# Altium PCB pcb.PcbDoc
Units mm, origin at the board's own origin, x right, y up, seen from the top; angles counter-clockwise.
Board outline 70 x 60 mm, 2 copper layers (Top Layer, Bottom Layer); 55 components, 56 nets, 216 pads, 87 vias.
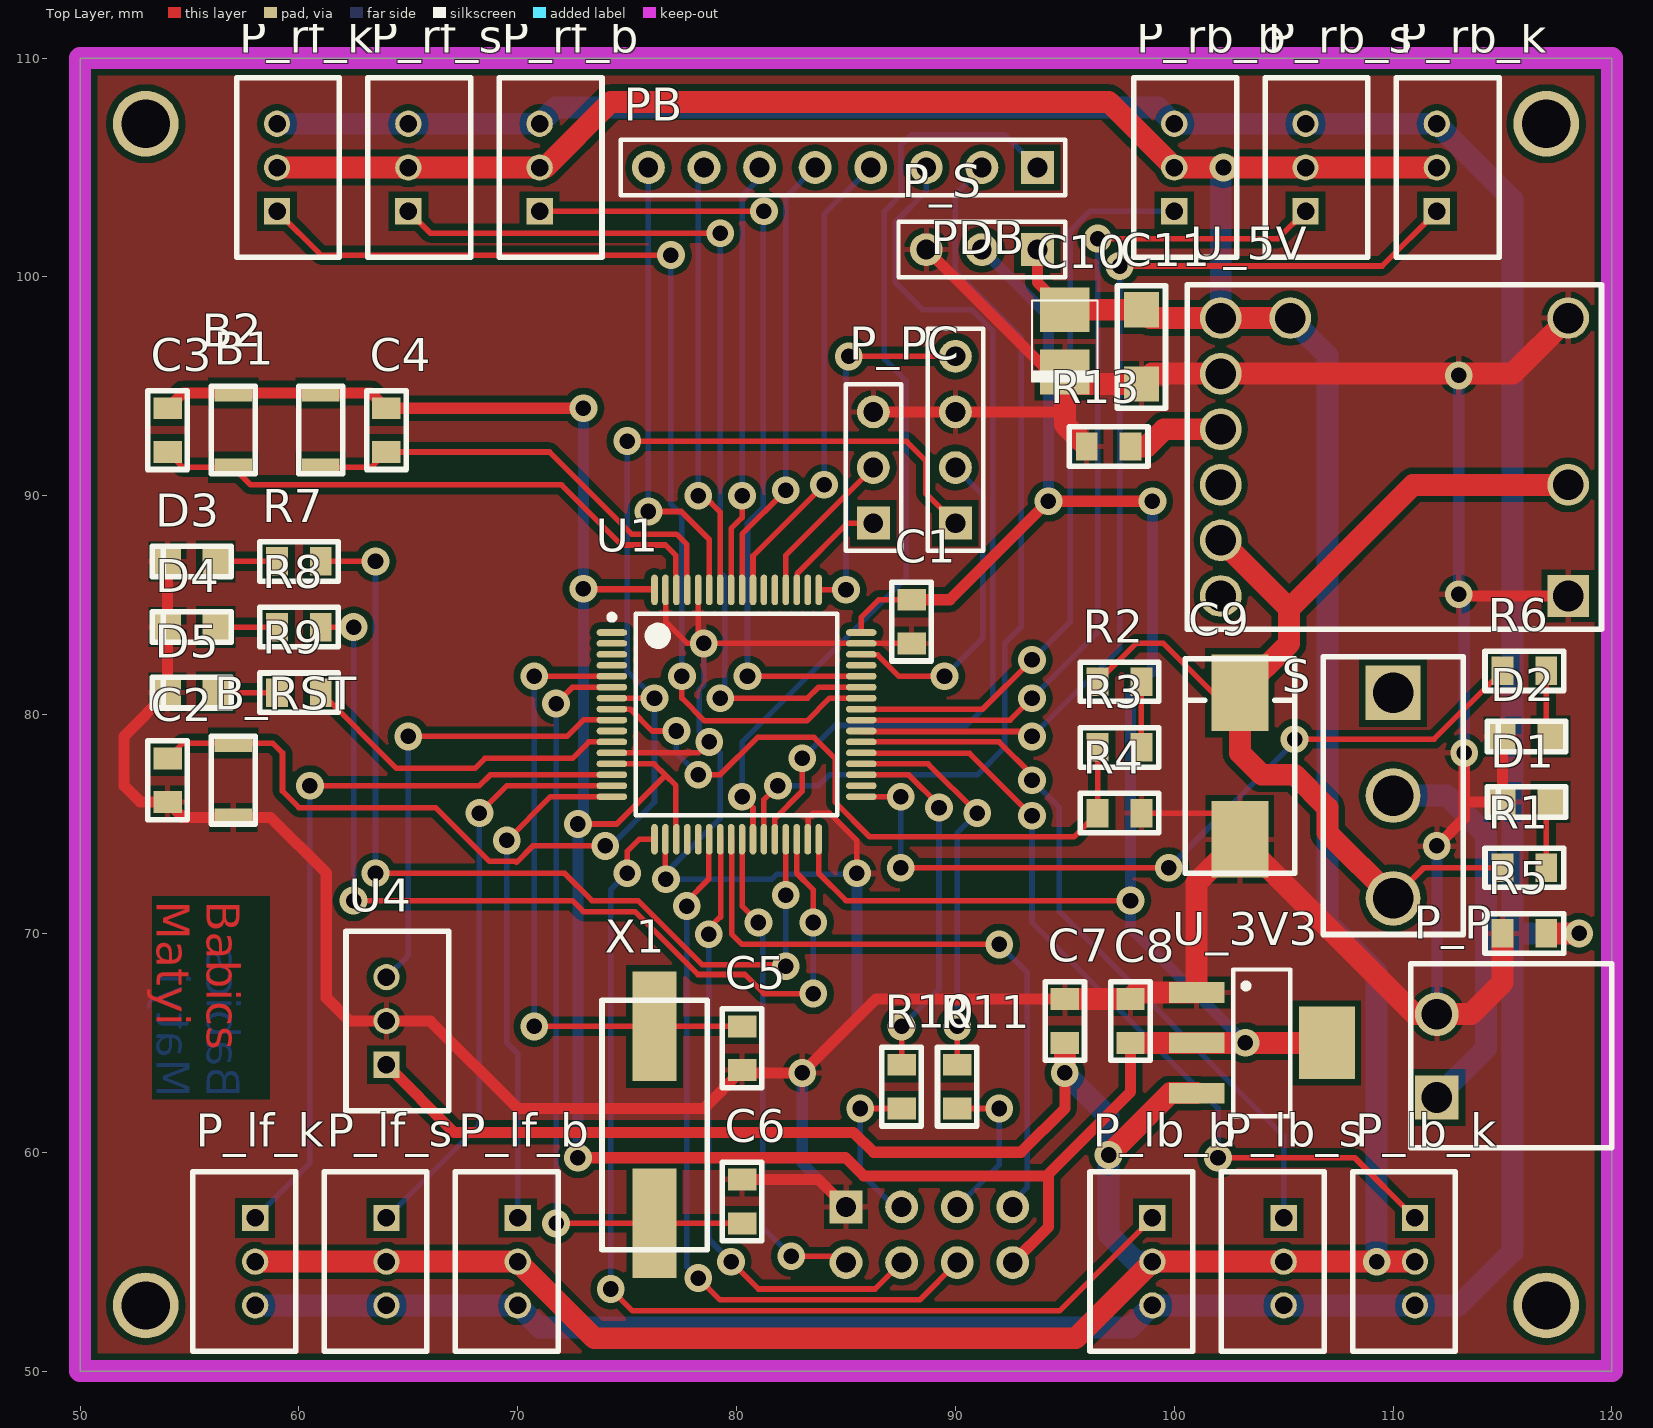
[diagram p0: Top Layer view]
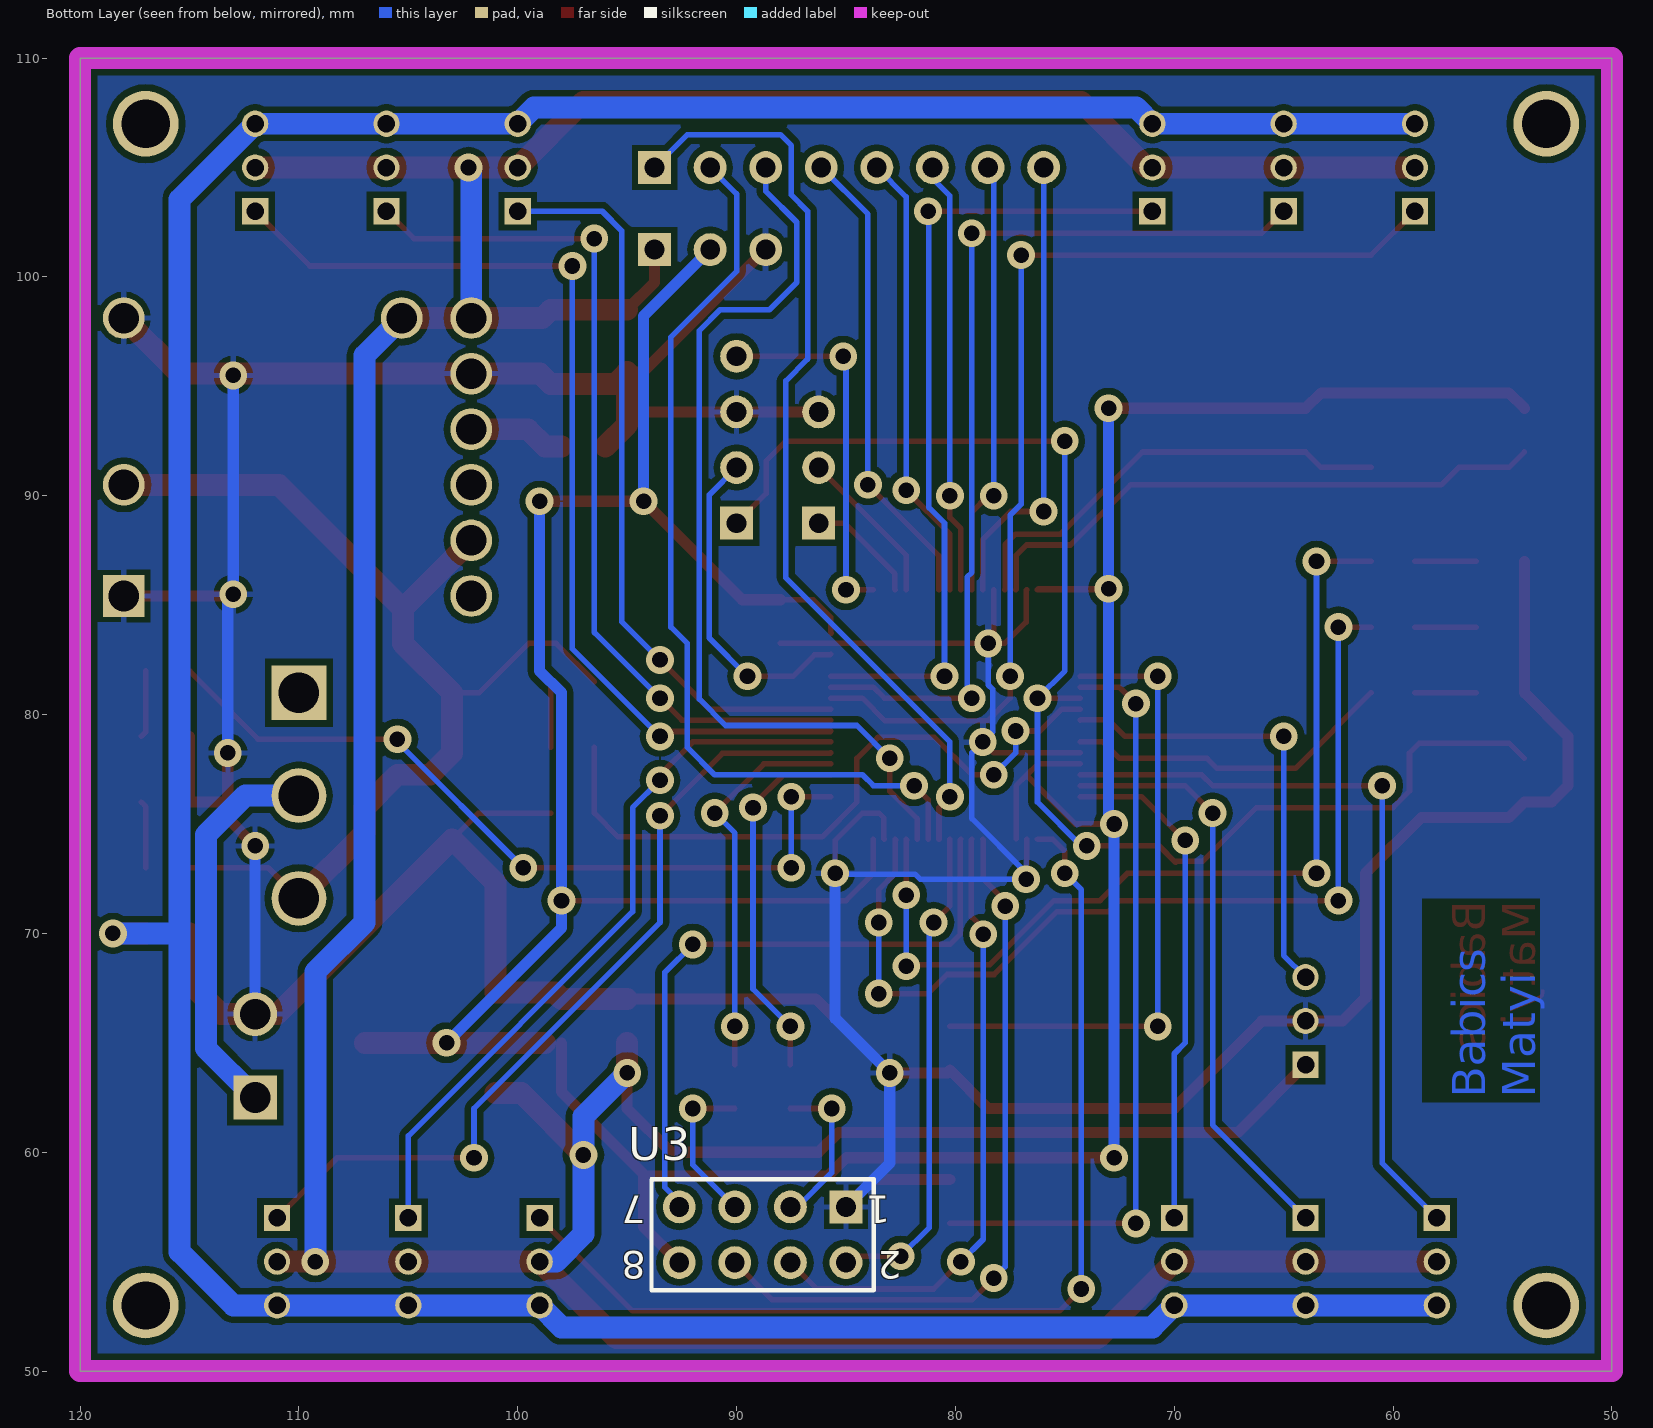
[diagram p1: Bottom Layer view, seen from below]

## Layer stack, top to bottom
Top Solder: solder mask 0.0102, Solder Resist, Dk 3.5
Top Layer: signal copper 0.0356
Dielectric 1: dielectric 0.32, FR-4, Dk 4.8
Bottom Layer: signal copper 0.0356
Bottom Solder: solder mask 0.0102, Solder Resist, Dk 3.5

## Board outline
50,50 120,50 120,110 50,110

## Design rules (kind name [scope] priority, off if disabled: settings)
Clearance [All] p1: gap=0.2 ignorepadtopadclearanceinfootprint=FALSE except(0: Arc-Hole Track-Hole SMDPad-Hole THPad-Hole Via-Hole Fill-Hole Poly-Hole Region-Hole Text-Hole; 0.3: Arc-Fill Arc-Poly Arc-Region Track-Fill Track-Poly Track-Region SMDPad-Fill SMDPad-Poly SMDPad-Region THPad-Fill THPad-Poly THPad-Region Via-Fill Via-Poly Via-Region Fill-Fill Fill-Poly Fill-Region Poly-Poly Poly-Region Region-Region)
PolygonConnect [All] p1: connectstyle=Relief reliefconductorwidth=0.254 reliefentries=4 polygonreliefangle="90 Angle" airgapwidth=0.254
RoutingVias [All] p1: holewidth=0.711 width=1.27 viastyle="Through Hole" minholewidth=0.711 minwidth=1.27 maxholewidth=0.711 maxwidth=1.27
SolderMaskExpansion [All] p1: expansion=0.102
Width [All] p1: maxlimit=2 minlimit=0.254 preferedwidth=0.254
30 further rules are at their usual default settings.

## Classes and differential pairs
component class mcu: B_RST C1 C2 C5 C6 P_PC PB PBA PDB U1 X1
component class motor: P_lb_b P_lb_k P_lb_s P_lf_b P_lf_k P_lf_s P_rb_b P_rb_k P_rb_s P_rf_b P_rf_k P_rf_s
component class power: C7 C8 C9 C10 C11 D1 D2 P_P P_S R1 R2 R3 R4 R5 R6 R13 S U_3V3 U_5V
component class wifi_sensor: B1 B2 C3 C4 D3 D4 D5 R7 R8 R9 R10 R11 U3 U4

## Components (designator, comment, footprint, x,y, rotation, side; value= is the part's Value field where it differs from the comment)
B1 "Button" Button 57,93 r90 top
B2 "Button" Button 61,93 r90 top
B_RST "Button" Button 57,77 r90 top
C1 "100nF" FP_0805_CAP_085 88,84.25 r90 top
C2 "100nF" FP_0805_CAP_085 54,77 r90 top
C3 "100nF" FP_0805_CAP_085 54,93 r90 top
C4 "100nF" FP_0805_CAP_085 64,93 r90 top
C5 "18pF" FP_0805_CAP_085 80.25,64.75 r90 top
C6 "18pF" FP_0805_CAP_085 80.25,57.75 r270 top
C7 "10uF" FP_0805_CAP_085 95,66 r270 top
C8 "10uF" FP_0805_CAP_085 98,66 r270 top
C9 "330uF" FP_7343 103,77.65 r270 top
C10 "100uF" FP_3528 95,97.075 r90 top
C11 "220uF" FP_1206_CAP_125 98.5,96.8 r90 top
D1 "LED Blue" FP_0805_LED_RED 117.1,76 r180 top
D2 "LED Red" FP_0805_LED_RED 117.1,79 r180 top
D3 "LED Yellow" FP_0805_LED_RED 56.1,87 r180 top
D4 "LED Yellow" FP_0805_LED_RED 56.1,84 r180 top
D5 "LED Yellow" FP_0805_LED_RED 56.1,81 r180 top
P_lb_b "Conn_3P" 3P_CONN_2MM 99,57 r270 top
P_lb_k "Conn_3P" 3P_CONN_2MM 111,57 r270 top
P_lb_s "Conn_3P" 3P_CONN_2MM 105,57 r270 top
P_lf_b "Conn_3P" 3P_CONN_2MM 70,57 r270 top
P_lf_k "Conn_3P" 3P_CONN_2MM 58,57 r270 top
P_lf_s "Conn_3P" 3P_CONN_2MM 64,57 r270 top
P_P "Power_In" SORK.3.81mm 112,62.5 r90 top
P_PC "Header 3" HDR1X3 86.25,88.75 r90 top
P_rb_b "Conn_3P" 3P_CONN_2MM 100,103 r90 top
P_rb_k "Conn_3P" 3P_CONN_2MM 112,103 r90 top
P_rb_s "Conn_3P" 3P_CONN_2MM 106,103 r90 top
P_rf_b "Conn_3P" 3P_CONN_2MM 71,103 r90 top
P_rf_k "Conn_3P" 3P_CONN_2MM 59,103 r90 top
P_rf_s "Conn_3P" 3P_CONN_2MM 65,103 r90 top
P_S "Header 3" HDR1X3 93.75,101.25 r180 top
PB "" HDR1X8 93.75,105 r180 top
PDB "Header 4" HDR1X4 90,88.75 r90 top
R1 "270R" FP_0805_RES 116,73 r180 top
R2 "20K" FP_0805_RES 97.5,81.5 r180 top
R3 "20K" FP_0805_RES 97.5,78.5 r0 top
R4 "20K" FP_0805_RES 97.5,75.5 r180 top
R5 "0R" FP_0805_RES 116,70 r0 top
R6 "82R" FP_0805_RES 116,82 r180 top
R7 "100R" FP_0805_RES 60,87 r0 top
R8 "100R" FP_0805_RES 60,84 r0 top
R9 "100R" FP_0805_RES 60,81 r0 top
R10 "1K" FP_0805_RES 87.54,63 r90 top
R11 "1K" FP_0805_RES 90.08,63 r90 top
R13 "160R" FP_0805_RES 97,92.25 r0 top
S "Slider" Slide 110,76.3 r90 top
U1 "STM32L476RET6" STM32L476RET6 80,80 r0 top
U3 "ESP8266" HDR2X4 85,57.5 r0 bottom
U4 "Sensor" 3P_CONN_2mm 64,64 r90 top
U_3V3 "LD1117S33V" FP_SOT223 104,65 r0 top
U_5V "PTH08T231WAD" "5V SUPPLY" 118,85.42 r180 top
X1 "8MHz" OSC 76.25,61.25 r270 top

## Footprints (in the part's own frame and the unit in brackets; to place one, negate y for a bottom-side part, rotate by r counter-clockwise, add the part's x,y. Pads: shape width x height; smd on the part's side, far side on the other; paste and mask are expansions set on the pad)
3P_CONN_2MM [mm]
  rect 1.2x1.2 hole 0.8: 1(0,0)
  round 1.2 hole 0.8: 2(2,0) 3(4,0)
  silkscreen extent -2.1,-2.85 6.1,1.85
3P_CONN_2mm [mm]
  rect 1.2x1.2 hole 0.8: 1(0,0)
  round 1.2 hole 0.8: 2(2,0) 3(4,0)
  silkscreen extent -2.1,-2.85 6.1,1.85
"5V SUPPLY" [mil]
  rect 75x75 hole 55: 1(0,0)
  round 75 hole 55: 2(0,-200) 3(0,-500) 4(500,-500) 5(625,-500) 6(625,-400) 7(625,-300) 8(625,-200) 9(625,-100) 10(625,0)
  silkscreen extent -60,-560 685,60
Button [mm]
  rect 0.8x1.7 smd: 1(-1.7,0) 2(1.7,0)
  silkscreen extent -2,-1 2,1
FP_0805_CAP_085 [mm] "0805 kapacitás YAGEO 0.85mm magas"
  rect 1x1.3 smd: 1(-1,0) 2(1,0)
  silkscreen extent -1.8,-0.9 1.8,0.9, body extent -1,-0.64 1.03,0.64, height 0.85
FP_0805_LED_RED [mm] "0805 méretû piros LED"
  rect 1.2x1.3 smd: A(-0.1,0) K(2.1,0)
  silkscreen extent -0.8,-0.7 2.8,0.7, body extent 0.01,-0.63 2.03,0.62, height 1.1
FP_0805_RES [mm] "0805 ellenállás"
  rect 1x1.3 smd: 1(-1,0) 2(1,0)
  silkscreen extent -1.8,-0.9 1.8,0.9, body extent -1,-0.62 1,0.63, height 0.62
FP_1206_CAP_125 [mm] "1206 kapacitás 1.25 mm"
  rect 1.6x1.6 smd: 1(-1.7,0) 2(1.7,0)
  silkscreen extent -2.8,-1.1 2.8,1.1, body extent -1.52,-0.79 1.58,0.79, height 1.25
FP_3528 [mm] "3528 TANTÁL SMD \"B\"-TOK"
  rect 2.05x2.25 smd: N(-1.425,0) P(1.425,0)
  silkscreen extent -1.85,-1.5 1.85,1.5, body extent -2.52,-1.5 2.48,1.5, height 2.11
FP_7343 [mm]
  rect 3.5x2.6 smd: N(3.35,0) P(-3.35,0)
  silkscreen extent -4.9,-2.5 4.9,2.5, body extent -4.49,-2.31 4.5,2.31, height 3.1
FP_SOT223 [mm] "SOT223 package, 3 leads"
  rect 2.55x0.95 smd: 1(-2.975,2.3) 2(-2.975,0) 3(-2.975,-2.3)
  rect 2.55x3.3 smd: 2(2.975,0)
  silkscreen extent -1.3,-3.35 1.3,3.35, body extent -3.5,-3.25 3.5,3.25, height 1.65
HDR1X3 [mm] "Connector; Header; 3 Position"
  rect 1.5x1.5 hole 0.9: 1(0,0)
  round 1.5 hole 0.9: 2(2.54,0) 3(5.08,0)
  silkscreen extent -1.27,-1.27 6.35,1.27
HDR1X4 [mm] "Connector; Header; 4 Position"
  rect 1.5x1.5 hole 0.9: 1(0,0)
  round 1.5 hole 0.9: 2(2.54,0) 3(5.08,0) 4(7.62,0)
  silkscreen extent -1.27,-1.27 8.89,1.27
HDR1X8 [mm] "Connector; Header; 8 Position"
  rect 1.5x1.5 hole 0.9: 1(0,0)
  round 1.5 hole 0.9: 2(2.54,0) 3(5.08,0) 4(7.62,0) 5(10.16,0) 6(12.7,0) 7(15.24,0) 8(17.78,0)
  silkscreen extent -1.27,-1.27 19.05,1.27
HDR2X4 [mm] "Connector; Header; 4x2 Position"
  rect 1.5x1.5 hole 0.9: 1(0,0)
  round 1.5 hole 0.9: 2(0,2.54) 3(2.54,0) 4(2.54,2.54) 5(5.08,0) 6(5.08,2.54) 7(7.62,0) 8(7.62,2.54)
  silkscreen extent -1.27,-1.27 8.89,3.81
OSC [mm]
  rect 5x2 smd: 1(-4.5,0) 2(4.5,0)
  silkscreen extent -5.7,-2.4 5.7,2.4, body extent -5.7,-2.4 5.7,2.4, height 4.4
Slide [mm]
  rect 2.5x2.5 hole 1.85: 1(4.7,0)
  round 2.5 hole 1.85: 2(0,0) 3(-4.7,0)
  silkscreen extent -6.35,-3.2 6.35,3.2
SORK.3.81mm [mm]
  rect 2x2 hole 1.4: 1(0,0)
  round 2 hole 1.4: 2(3.81,0)
  silkscreen extent -2.3,-8 6.11,1.2
STM32L476RET6 [mm] "TSQFP, 64-Leads, Body 10.00x10.00mm, Pitch 0.50mm, IPC Medium Density"
  oval 1.4x0.3 smd: 1(-5.7,3.75) 2(-5.7,3.25) 3(-5.7,2.75) 4(-5.7,2.25) 5(-5.7,1.75) 6(-5.7,1.25) 7(-5.7,0.75) 8(-5.7,0.25) 9(-5.7,-0.25) 10(-5.7,-0.75) 11(-5.7,-1.25) 12(-5.7,-1.75) 13(-5.7,-2.25) 14(-5.7,-2.75) 15(-5.7,-3.25) 16(-5.7,-3.75) 33(5.7,-3.75) 34(5.7,-3.25) 35(5.7,-2.75) 36(5.7,-2.25) 37(5.7,-1.75) 38(5.7,-1.25) 39(5.7,-0.75) 40(5.7,-0.25) 41(5.7,0.25) 42(5.7,0.75) 43(5.7,1.25) 44(5.7,1.75) 45(5.7,2.25) 46(5.7,2.75) 47(5.7,3.25) 48(5.7,3.75)
  oval 0.3x1.4 smd: 17(-3.75,-5.7) 18(-3.25,-5.7) 19(-2.75,-5.7) 20(-2.25,-5.7) 21(-1.75,-5.7) 22(-1.25,-5.7) 23(-0.75,-5.7) 24(-0.25,-5.7) 25(0.25,-5.7) 26(0.75,-5.7) 27(1.25,-5.7) 28(1.75,-5.7) 29(2.25,-5.7) 30(2.75,-5.7) 31(3.25,-5.7) 32(3.75,-5.7) 49(3.75,5.7) 50(3.25,5.7) 51(2.75,5.7) 52(2.25,5.7) 53(1.75,5.7) 54(1.25,5.7) 55(0.75,5.7) 56(0.25,5.7) 57(-0.25,5.7) 58(-0.75,5.7) 59(-1.25,5.7) 60(-1.75,5.7) 61(-2.25,5.7) 62(-2.75,5.7) 63(-3.25,5.7) 64(-3.75,5.7)
  silkscreen extent -5.82,-4.6 4.6,4.6, body extent -5,-5 5,5, height 1.6

## Part data
C1 C2 C3 C4: library part "CAP 100nF", "Capacitor", Tolerance=10%, Voltage=50V, Name="100nF 0805 10% 50V X7R 0805B104K500CT (WAL)", Reference=82-10-76, Supplier=Lomex
C5 C6: library part CAP, "Capacitor", Tolerance=5%, Voltage=50V, Name="18pF 0805 5% 50V NP0 CL21C180JBANNNC (SAM)", Reference=82-08-38, Supplier=Lomex
C7 C8: library part "CAP 10uF", "Capacitor", Tolerance=10%, Voltage=16V, Name="SMD Multilayer Ceramic Capacitor, 0805", Reference=2320856, Supplier=Farnell
C9: library part CAP_ELECT, "Polarized Capacitor", Tolerance=20%, Voltage=10V, Name="T491D337M010AT -  Surface Mount Tantalum Capacitor, 330 µF, 10 V, T491 Series, ± 20%, 2917 [7343 Metric]", Reference=2762172, Supplier=Farnell
C10: library part CAP_ELECT, "Polarized Capacitor", Tolerance=10%, Voltage=6.3V, Name="100uF ½B½ 6.3V 10% TAJB107K006RNJ (AVX) 3528", Reference=92-01-45, Supplier=Lomex
C11: library part CAP, "Capacitor", Tolerance=20%, Voltage=6.3V, Name="GRM32ER60J227ME05L -  SMD Multilayer Ceramic Capacitor, 1210 [3225 Metric], 220 µF, 6.3 V, ± 20%, X5R, GRM Series", Reference=2671588, Supplier=Farnell
D1: "Blue LED", I_max=25mA, Name="2012 BLUE 465nm 170mcd FYLS-0805UBC (FYL) W.CLEAR 2.0x1.2x0.8mm 0805 130°", Reference=95-01-58, Supplier=Lomex, U_fw=3.3V, Wavelength=465nm
D2: "Red LED", I_max=30mA, Name="2012 RED 643nm 28mcd FYLS-0805HRC (FYL) W.CLEAR 2.0x1.2x0.8mm 0805 130°", Reference=95-00-19, Supplier=Lomex, U_fw=1.9V, Wavelength=643nm
D3 D4 D5: "Yellow LED", I_max=20mA, Name="2012 YELLOW 590nm 220mcd 0805UYC (FEM) 20mA W.CLEAR 2.0x1.2x0.68mm 0805 140°", Reference=95-03-84, Supplier=Lomex, U_fw=2.1V, Wavelength=590nm
P_PC P_S: "Header, 3-Pin", LatestRevisionDate=17-Jul-2002, LatestRevisionNote="Re-released for DXP Platform.", Publisher="Altium Limited"
PB: library part "Header 8", "Header, 8-Pin", LatestRevisionDate=17-Jul-2002, LatestRevisionNote="Re-released for DXP Platform.", Name="TÜSKESOR 40 P PHSS-40- 6/3 (T-T) 2.54mm PIN 0.64x0.64 TÖRDELHETÖ", Publisher="Altium Limited", Reference=43-00-73, Supplier=Lomex
PDB: "Header, 4-Pin", LatestRevisionDate=17-Jul-2002, LatestRevisionNote="Re-released for DXP Platform.", Publisher="Altium Limited"
R1: library part "RES 270R", "Resistor", Power=125mW, Tolerance=5%, Name="YAGEO (PHYCOMP)  RC0805JR-07270RL  SMD Chip Resistor, Thick Film, 270 ohm", Reference=9233938, Supplier=Farnell
R2 R3 R4 R13: library part RES, "Resistor", Power=0.125W, Tolerance=1%, Supplier=Lomex
  R2 R3 R4: Name="20K0 0805 1% CR-05FL7---20K 0.125W (VIK)", Reference=80-11-47
  R13: Name="160R 0805 1% RC0805FR-07160RL 0.125W (YAG)", Reference=80-01-97
R5: library part RES, "Resistor", Power=0.125W, Name="0R00 0805 CR-05JL7----0R 0.125W (VIK) Iav=2A", Reference=81-10-02, Supplier=Lomex
R6: library part "RES 82R", "Resistor", Power=125mW, Tolerance=5%, Name="MULTICOMP  MCMR08X820 JTL  SMD Chip Resistor, Ceramic, 82 ohm", Reference=2073848, Supplier=Farnell
R7 R8 R9: library part "RES 100R", "Resistor", Power=125mW, Tolerance=5%, Name="YAGEO (PHYCOMP)  RC0805JR-07100RL  SMD Chip Resistor, Thick Film, 100 ohm,", Reference=9233881, Supplier=Farnell
R10 R11: library part "RES 1K", "Resistor", Power=125mW, Tolerance=5%, Name="YAGEO (PHYCOMP)  RC0805JR-071KL  SMD Chip Resistor, Thick Film, 1 kohm", Reference=9234004, Supplier=Farnell
U1: Manufacturer=STMICROELECTRONICS, Component Type=IC, Manufacturer Part No=STM32L476RET6, Name="STM32L476RET6 -  ARM Microcontroller, Ultra Low Power, STM32 Family STM32L4 Series Microcontrollers, 32bit, 80 MHz", Reference=2494459, Supplier=Farnell
U4: library part Conn_3P, Name="TÁPCSATL. 2.00mm 3P APA 180° NCW200-03S (G-S) FORR.", Reference=43-16-04, Supplier=Lomex
U_5V: library part 5V_SUPPLY, Name="PTH08T231WAD -  Non Isolated POL DC/DC Converter, 1 Output, 33 W, 5.5 V, 6 A, Adjustable, Through Hole", Reference=2383162, Supplier=Farnell
X1: library part Crystal, "Quarz Crystal", Name="QCS8.00000F18B23M -  Crystal, 8 MHz, SMD, 12.5mm x 4.6mm, 30 ppm, 18 pF, 20 ppm, QCS Series", Reference=2508478, Supplier=Farnell
B1 B2 B_RST: Name="TACT 2.5x 3 2P SPST B3U-1000P (OMR) 2.5x3x1.2mm SMD H=1.2mm 153g", Reference=45-09-96, Supplier=Lomex
P_lb_b P_lb_k P_lb_s P_lf_b P_lf_k P_lf_s P_rb_b P_rb_k P_rb_s P_rf_b P_rf_k P_rf_s: Name="TÁPCSATL. 2.00mm 3P APA 180° NCW200-03S (G-S) FORR.", Reference=43-16-04, Supplier=Lomex
P_P: Name="SORKAPOCS 2 P RM3.81 CSAPSORLÉC 90° TLPHC100R-02P (TLM) ZÁRT 10A 150V VDE", Reference=43-27-99, Supplier=Lomex
S: Name="Kapcsoló: csúszó; Pozíció:2; SPDT; 2A/250VAC; 5A/28VDC; ON-ON", Reference=5MS1S102AM2QE, Supplier=TME
U_3V3: Name="TS1117BCW-3.3 -  Fixed LDO Voltage Regulator, 0V to 12V, 1.3V Dropout, 3.3Vout, 800mAout, SOT-223-3", Reference=7208359, Supplier=Farnell

## Free pads (board coordinates)
  round 3 hole 2.2: 1(53,107) 2(117,107) 3(117,53) 4(53,53)

## Via types
v1: diameter 1.27, hole 0.711, Top Layer to Bottom Layer, 87 vias

## Nets (pads, with @x,y where several pads share a name; then routed paths per layer and width w, separated by ;. In a path a pad name is that pad's centre, name@x,y a point inside that pad or via, vN(x,y) a via of type N, cw(c..) or ccw(c..) an arc to the next point about the centre after c; other vN are vias at no path point)
3V3: B1.2 B2.2 C1.2 C3.2 C4.2 C8.2 P_S.2 U1.13 U1.19 U1.32 U1.48 U1.64 U3.8 U_3V3.2 | length 186.2
  Top Layer w0.254: v1(72.75,75) 74.523,75 76.75,77.227 ; U1.13 76.227,77.75 76.75,77.227 ; U1.19@77.227,74.323 77.227,76.75 76.75,77.227 ; U1.32 83.75,72.75 85,71.5 v1(98,71.5) ; U1.48@85.677,83.727 U1.48 85.7,84.45 86.5,85.25 C1.2 ; v1(73,85.75) 76.2,85.75 U1.64 73.05,85.7 v1(73,85.75)
  Top Layer w0.508: C3.2 54.7,94.7 B1.2 B2.2 63.3,94.7 C4.2 v1(73,94) ; v1(72.75,59.75) 84.973,59.75 85.812,58.911 94.161,58.911 94.25,59 ; C1.2 89.75,85.25 v1(94.25,89.75) v1(99,89.75) ; U3.8 94.25,56.59 94.25,59 ; C8.2 98,62.75 94.25,59
  Top Layer w1: 98.75,65 101.025,65 v1(103.25,65) U_3V3.2@106.975,65
  Bottom Layer w0.508: v1(72.75,59.75) v1(72.75,75) 73,75.25 v1(73,85.75) v1(73,94) ; P_S.2 94.25,98.21 v1(94.25,89.75) ; v1(99,89.75) 99,82 98,81 v1(98,71.5) 98,70.25 v1(103.25,65)
5V: C7.2 C10.P C11.2 P_lb_b.2 P_lb_k.2 P_lb_s.2 P_lf_b.2 P_lf_k.2 P_lf_s.2 P_rb_b.2 P_rb_k.2 P_rb_s.2 P_rf_b.2 P_rf_k.2 P_rf_s.2 P_S.1 U4.1 U_3V3.3 U_5V.4 U_5V.5 | length 229.2
  Top Layer w0.508: U4.1 67.089,60.911 85.339,60.911 86.25,60 93,60 95,62 v1(95,63.625) ; P_S.1 93.75,99.75 C10.P
  Top Layer w1: P_lf_k.2 P_lf_s.2 P_lf_b.2 73.5,51.5 95.5,51.5 P_lb_b.2 P_lb_s.2 v1(109.25,55) P_lb_k.2 ; P_rf_k.2 P_rf_s.2 P_rf_b.2 71.25,105 74.25,108 97,108 P_rb_b.2 v1(102.25,105) P_rb_s.2 P_rb_k.2 ; v1(95,63.625) C7.2 ; C10.P C11.2 98.88,98.12 U_5V.5 U_5V.4 ; v1(97,59.875) 99.825,62.7 U_3V3.3
  Bottom Layer w1: v1(95,63.625) 97,61.625 v1(97,59.875) 97,56.25 98.25,55 P_lb_b.2 ; U_5V.5 102.125,104.875 v1(102.25,105) ; U_5V.4 107,96.42 107,70.5 109.25,68.25 v1(109.25,55)
7V4: C9.P R1.2 R2.2 S.3 U_5V.2 U_5V.9 | length 51.2
  Top Layer w0.254: R2.2 98.25,83.25 99.5,83.25 101.75,81 C9.P ; S.3 111.4,73 R1.2
  Top Layer w1: U_5V.9 105.25,84.835 ; S.3 107,74.6 107,75.75 105.5,77.25 104,77.25 103,78.25 C9.P 105.25,83.25 105.25,84.835 ; U_5V.2 110.915,90.5 105.25,84.835
GND: B_RST.1 C1.1 C2.1 C5.1 C6.1 C7.1 C8.1 C9.N C10.N C11.1 D1.K D2.K D3.K D4.K D5.K P_P.2 P_PC.3 P_S.3 PDB.3 R4.1 R5.1 R13.1 U1.12 U1.18 U1.31 U1.47 U1.60 U1.63 U3.1 U4.2 U_3V3.1 U_5V.1 U_5V.3 U_5V.6 | length 258.5
  Top Layer w0.254: U1.12 78.25,78.25 v1(78.75,78.75) ; U1.18 76.75,72.5 v1(76.773,72.477) ; U1.63 76.773,85.677 76.773,84.227 77.75,83.25 v1(78.5,83.25) U1.47 C1.1 ; v1@78.25,83.75 U1.60 ; U1.31 83.273,74.323 83.273,75.273 83.5,75.5 84.25,75.5 85.5,74.25 v1(85.5,72.75) ; R4.1 101.8,75.5 C9.N
  Top Layer w0.508: D3.K D4.K D5.K 52,79 52,76.75 52.75,76 C2.1 54.7,75.3 B_RST.1 58.7,75.3 61.25,72.75 61.25,67.06 62.31,66 U4.2 66,66 70,62 78.5,62 C5.1 80.375,63.625 v1(83,63.625) 86.375,67 C7.1 ; C6.1 83.75,58.75 U3.1 ; P_PC.3 PDB.3 95,93.83 ; P_S.3 94.27,95.65 C10.N ; v1(112,74) 113.25,75.25 113.25,76 ; v1(113,85.5) 113.08,85.42 U_5V.1 ; v1(113.25,78.25) 113.25,76 ; D2.K D1.K 113.25,76
  Top Layer w1: C7.1 C8.1 98.3,67.3 U_3V3.1 101.025,72.325 C9.N 110.99,66.31 P_P.2 113.56,66.31 115,67.75 R5.1 ; R13.1 95,93.25 95,93.83 C10.N 95.55,95.1 C11.1 98.98,95.58 U_5V.6 115.46,95.58 U_5V.3
  Bottom Layer w0.254: v1(78.5,83.25) 78.5,81.36 78.288,81.148 78.288,79.212 v1(78.75,78.75) 79.25,78.25 79.25,75.25 76.773,72.773 v1(76.773,72.477) 81.617,72.477 81.852,72.712 85.462,72.712 v1(85.5,72.75)
  Bottom Layer w0.508: U3.1 83,59.5 v1(83,63.625) 85.5,66.125 v1(85.5,72.75) ; P_P.2 v1(112,74) ; v1(113,95.5) v1(113,85.5) 113.25,85.25 v1(113.25,78.25)
GNDM: P_lb_b.3 P_lb_k.3 P_lb_s.3 P_lf_b.3 P_lf_k.3 P_lf_s.3 P_rb_b.3 P_rb_k.3 P_rb_s.3 P_rf_b.3 P_rf_k.3 P_rf_s.3 R5.2 | length 170.4
  Top Layer w1: R5.2 v1(118.5,70)
  Bottom Layer w1: P_lf_k.3 P_lf_s.3 P_lf_b.3 71,52 98,52 P_lb_b.3 P_lb_s.3 P_lb_k.3 113,53 115.45,55.45 115.45,70 ; P_rf_k.3 P_rf_s.3 P_rf_b.3 71.75,107.75 99.25,107.75 P_rb_b.3 P_rb_s.3 P_rb_k.3 115.45,103.55 115.45,70 ; v1(118.5,70) 115.45,70
NetB1_1: B1.1 C3.1 U1.62 | length 26.8
  Top Layer w0.254: C3.1 54.7,91.3 B1.1 57.8,90.5 72,90.5 74.75,87.75 76.75,87.75 77.227,87.273 77.227,85.723 U1.62
NetB2_1: B2.1 C4.1 U1.61 | length 20.9
  Top Layer w0.254: B2.1 63.3,91.3 C4.1 71.45,92 75.2,88.25 77.25,88.25 77.727,87.773 77.727,85.723 U1.61
NetB_RST_2: B_RST.2 C2.2 PDB.1 U1.7 | length 64.9
  Top Layer w0.254: C2.2 54.7,78.7 B_RST.2 58.8,78.7 59.25,78.25 59.25,76.5 60,75.75 66.25,75.75 68.712,73.288 69.898,73.288 69.936,73.25 70.686,74 v1(74,74) ; U1.7 v1(76.25,80.75) ; v1(75,92.5) 74.532,92.5 75,92.032 75,92.484 87.766,92.484 88.654,91.596 88.654,90.096 PDB.1
  Bottom Layer w0.254: v1(74,74) 74.25,74 76.25,76 v1(76.25,80.75) 75,82 v1(75,92.5)
NetC5_2: C5.2 U1.5 X1.1 | length 29
  Top Layer w0.254: v1(70.75,65.75) X1.1 C5.2 ; v1(70.75,81.75) U1.5
  Bottom Layer w0.254: v1(70.75,65.75) v1(70.75,81.75)
NetC6_2: C6.2 U1.6 X1.2 | length 35.1
  Top Layer w0.254: v1(71.75,56.75) 72.5,56.75 X1.2 C6.2 ; v1(71.75,80.5) 72.5,81.25 U1.6
  Bottom Layer w0.254: v1(71.75,56.75) v1(71.75,80.5)
NetD1_1: D1.A R1.1 | length 3.1
  Top Layer w0.254: R1.1 117,75.8 D1.A
NetD2_1: D2.A R6.1 | length 3.1
  Top Layer w0.254: R6.1 117,79.2 D2.A
NetD3_1: D3.A R7.1 | length 2.8
  Top Layer w0.254: D3.A R7.1
NetD4_1: D4.A R8.1 | length 2.8
  Top Layer w0.254: D4.A R8.1
NetD5_1: D5.A R9.1 | length 2.8
  Top Layer w0.254: D5.A R9.1
NetP_lb_b_1: P_lb_b.1 U1.17 | length 48.7
  Top Layer w0.254: v1(74.25,53.75) 75.25,52.75 94.75,52.75 P_lb_b.1 ; v1(75,72.75) 75,73.75 75.55,74.3 U1.17
  Bottom Layer w0.254: v1(74.25,53.75) 74.25,72 v1(75,72.75)
NetP_lb_k_1: P_lb_k.1 U1.37 | length 38.3
  Top Layer w0.254: U1.37 85.723,78.227 90.648,78.227 v1(93.5,75.375) ; v1(102,59.75) 108.25,59.75 P_lb_k.1
  Bottom Layer w0.254: v1(93.5,75.375) 93.5,70.5 102,62 v1(102,59.75)
NetP_lb_s_1: P_lb_s.1 U1.38 | length 33.4
  Top Layer w0.254: U1.38 92,78.75 93.5,77.25 v1(93.5,77)
  Bottom Layer w0.254: v1(93.5,77) 94.75,75.75 94.75,71 105,60.75 P_lb_s.1
NetP_lf_b_1: P_lf_b.1 U1.16 | length 23.1
  Top Layer w0.254: v1(69.5,74.25) 71.5,76.25 U1.16
  Bottom Layer w0.254: v1(69.5,74.25) 69.5,65 70,64.5 P_lf_b.1
NetP_lf_k_1: P_lf_k.1 U1.14 | length 34.8
  Top Layer w0.254: v1(60.5,76.75) 68.25,76.75 68.75,77.25 U1.14
  Bottom Layer w0.254: P_lf_k.1 60.5,59.5 v1(60.5,76.75)
NetP_lf_s_1: P_lf_s.1 U1.15 | length 26.8
  Top Layer w0.254: v1(68.25,75.5) 69.5,76.75 U1.15
  Bottom Layer w0.254: P_lf_s.1 68.25,61.25 v1(68.25,75.5)
NetP_P_1: P_P.1 S.2 | length 17.9
  Bottom Layer w1: S.2 112.45,76.3 114.25,74.5 114.25,64.75 P_P.1
NetP_PC_1: P_PC.1 U1.51 | length 5.2
  Top Layer w0.254: U1.51 82.773,85.723 82.773,86.448 85.075,88.75 P_PC.1
NetP_PC_2: P_PC.2 U1.52 | length 7.2
  Top Layer w0.254: U1.52 82.25,87.29 P_PC.2
NetP_rb_b_1: P_rb_b.1 U1.41 | length 34.2
  Top Layer w0.254: U1.41 91.25,80.25 v1(93.5,82.5)
  Bottom Layer w0.254: v1(93.5,82.5) 95.25,84.25 95.25,102.11 96.14,103 P_rb_b.1
NetP_rb_k_1: P_rb_k.1 U1.39 | length 46.6
  Top Layer w0.254: U1.39 85.723,79.227 93.273,79.227 v1(93.5,79) ; v1(97.5,100.5) 109.5,100.5 P_rb_k.1
  Bottom Layer w0.254: v1(93.5,79) 97.5,83 v1(97.5,100.5)
NetP_rb_s_1: P_rb_s.1 U1.40 | length 40.5
  Top Layer w0.254: U1.40 92.5,79.75 v1(93.5,80.75) ; v1(96.5,101.75) 104.75,101.75 P_rb_s.1
  Bottom Layer w0.254: v1(93.5,80.75) 96.5,83.75 v1(96.5,101.75)
NetP_rf_b_1: P_rf_b.1 U1.44 | length 37
  Top Layer w0.254: P_rf_b.1 v1(81.25,103) ; v1(80.5,81.75) U1.44
  Bottom Layer w0.254: v1(80.5,81.75) 80.5,88.75 81.212,89.462 81.212,102.962 v1(81.25,103)
NetP_rf_k_1: P_rf_k.1 U1.42 | length 48.3
  Top Layer w0.254: P_rf_k.1 61,101 v1(77,101) ; v1(77.5,81.75) 77.5,80.75 78.538,79.712 83.212,79.712 84.25,80.75 U1.42
  Bottom Layer w0.254: v1(77,101) 77,89.61 77.5,89.11 v1(77.5,81.75)
NetP_rf_s_1: P_rf_s.1 U1.43 | length 44.2
  Top Layer w0.254: P_rf_s.1 66,102 78.75,102 79.25,101.5 v1(79.25,102) ; v1(79.25,80.75) 83.25,80.75 83.75,81.25 U1.43
  Bottom Layer w0.254: v1(79.25,80.75) 79.25,80.576 79.462,80.364 79.462,86.288 79.25,86.5 v1(79.25,102)
NetPB_1: PB.1 U1.26 | length 42.8
  Top Layer w0.254: v1(80.25,76.25) 80.75,75.75 U1.26
  Bottom Layer w0.254: v1(80.25,76.25) 80.25,78.75 87.75,86.25 87.75,95.25 86.75,96.25 86.75,103 87.5,103.75 87.5,106 88,106.5 92.25,106.5 PB.1
NetPB_2: PB.2 U1.27 | length 42.4
  Top Layer w0.254: U1.27 81.25,76.11 v1(81.89,76.75)
  Bottom Layer w0.254: v1(81.89,76.75) 83.75,76.75 84.25,77.25 91,77.25 92.25,78.5 92.25,83.25 93,84 93,97.25 90,100.25 90,103.79 PB.2
NetPB_3: PB.3 U1.28 | length 42.1
  Top Layer w0.254: U1.28 81.75,75.25 83,76.5 v1(83,78)
  Bottom Layer w0.254: v1(83,78) 84.5,79.5 90.5,79.5 91.704,80.704 91.704,97.546 90.75,98.5 88.5,98.5 87.25,99.75 87.25,102.5 88.67,103.92 PB.3
NetPB_4: PB.4 U1.55 | length 21.5
  Top Layer w0.254: U1.55 80.75,87.25 v1(84,90.5)
  Bottom Layer w0.254: v1(84,90.5) 84,102.87 PB.4
NetPB_5: PB.5 U1.56 | length 20.7
  Top Layer w0.254: U1.56 80.25,88.25 v1(82.25,90.25)
  Bottom Layer w0.254: v1(82.25,90.25) 82.25,103.66 PB.5
NetPB_6: PB.6 U1.57 | length 20
  Top Layer w0.254: U1.57 79.75,88.5 80.25,89 v1(80.25,90)
  Bottom Layer w0.254: v1(80.25,90) 80.25,103.7 81.25,104.7 81,104.95 PB.6
NetPB_7: PB.7 U1.58 | length 20
  Top Layer w0.254: v1(78.25,90) 78.5,90 79.25,89.25 U1.58
  Bottom Layer w0.254: v1(78.25,90) 78.25,104.74 PB.7
NetPB_8: PB.8 U1.59 | length 21.3
  Top Layer w0.254: v1(75.97,89.28) 77.47,89.28 78.75,88 U1.59
  Bottom Layer w0.254: v1(75.97,89.28) PB.8
NetPDB_2: PDB.2 U1.46 | length 15
  Top Layer w0.254: U1.46 85.723,82.727 86.448,82.727 87.425,81.75 v1(89.5,81.75)
  Bottom Layer w0.254: v1(89.5,81.75) 91.25,83.5 91.25,90.04 PDB.2
NetPDB_4: PDB.4 U1.49 | length 16.8
  Top Layer w0.254: U1.49 v1(85,85.7) ; v1(85.13,96.37) PDB.4
  Bottom Layer w0.254: v1(85,85.7) 85,96.24 v1(85.13,96.37)
NetR2_1: R2.1 R3.2 | length 3
  Top Layer w0.254: R3.2 R2.1
NetR3_1: R3.1 R4.2 U1.8 | length 31.2
  Top Layer w0.254: U1.8 75.14,80.25 76.14,79.25 v1(77.25,79.25) ; v1(78.25,77.25) 79.25,77.25 80.962,78.962 83.538,78.962 84.5,78 84.5,76 86.087,74.413 95.413,74.413 R4.2 R3.1
  Bottom Layer w0.254: v1(77.25,79.25) 77.25,78.25 v1(78.25,77.25)
NetR6_2: R6.2 U1.33 | length 36.4
  Top Layer w0.254: U1.33 v1(87.5,76.25) ; v1(87.5,73) v1(99.75,73) ; v1(105.5,78.875) 111.875,78.875 R6.2
  Bottom Layer w0.254: v1(87.5,73) v1(87.5,76.25) ; v1(99.75,73) 105.5,78.75 v1(105.5,78.875)
NetR7_2: R7.2 U1.29 | length 43.1
  Top Layer w0.254: R7.2 v1(63.5,87) ; v1(63.5,72.75) 72.142,72.75 73.392,71.5 75.5,71.5 78.423,68.577 82.173,68.577 v1(82.25,68.5) ; v1(82.25,71.75) 82.25,74.254 82.227,74.277 U1.29
  Bottom Layer w0.254: v1(63.5,72.75) v1(63.5,87) ; v1(82.25,68.5) v1(82.25,71.75)
NetR8_2: R8.2 U1.30 | length 44.2
  Top Layer w0.254: R8.2 v1(62.5,84) ; v1(62.5,71.5) 72.5,71.5 73,71 75.358,71 78.235,68.123 80.377,68.123 81.25,67.25 v1(83.5,67.25) ; U1.30@82.727,74.277 U1.30 82.75,72.75 83.5,72 v1(83.5,70.5)
  Bottom Layer w0.254: v1(62.5,71.5) v1(62.5,84) ; v1(83.5,67.25) v1(83.5,70.5)
NetR9_2: R9.2 U1.11 | length 15.2
  Top Layer w0.254: R9.2 64.462,77.538 68.038,77.538 68.5,78 72.5,78 73.25,78.75 U1.11
NetR10_1: R10.1 U3.3 | length 7.4
  Top Layer w0.254: v1(85.651,62) R10.1
  Bottom Layer w0.254: v1(85.651,62) 85.651,59.072 87.223,57.5 U3.3
NetR10_2: R10.2 U1.35 | length 16.7
  Top Layer w0.254: U1.35 87.86,77.25 89.25,75.86 v1(89.25,75.75) ; R10.2 v1(87.54,65.75)
  Bottom Layer w0.254: v1(87.54,65.75) 89.25,67.46 v1(89.25,75.75)
NetR11_1: R11.1 U3.5 | length 7.2
  Top Layer w0.254: R11.1 v1(92,62)
  Bottom Layer w0.254: U3.5 92,59.42 v1(92,62)
NetR11_2: R11.2 U1.36 | length 18.3
  Top Layer w0.254: U1.36 88.75,77.75 v1(91,75.5) ; R11.2 v1(90.08,65.75) v1@90.08,65.92
  Bottom Layer w0.254: v1(90.08,65.75) 90.08,74.58 v1(91,75.5)
NetR13_2: R13.2 U_5V.7 | length 4.5
  Top Layer w1: R13.2 98.75,92.25 99.54,93.04 U_5V.7
NetU1_9: U1.9 U4.3 | length 21
  Top Layer w0.254: v1(65,79) 72.25,79 73.023,79.773 74.277,79.773 U1.9
  Bottom Layer w0.254: U4.3 65,69 v1(65,79)
NetU1_22: U1.22 U3.6 | length 33.6
  Top Layer w0.254: v1(77.727,71.25) 77.727,71.477 78.727,72.477 78.727,74.277 U1.22 ; v1(78.25,54.25) 79.25,53.25 88.37,53.25 U3.6
  Bottom Layer w0.254: v1(77.727,71.25) 77.727,54.773 v1(78.25,54.25)
NetU1_23: U1.23 U3.4 | length 29.1
  Top Layer w0.254: v1(78.727,69.96) 78.54,69.96 78.5,70 79.25,70.75 79.273,70.75 79.273,74.277 U1.23 ; v1(79.75,55) 81,53.75 86.33,53.75 U3.4
  Bottom Layer w0.254: v1(78.727,69.96) 78.727,56.023 v1(79.75,55)
NetU1_24: U1.24 U3.7 | length 29.7
  Top Layer w0.254: U1.24 79.773,74.277 79.773,69.977 80.25,69.5 v1(92,69.5)
  Bottom Layer w0.254: v1(92,69.5) 93.273,68.227 93.273,58.393 92.5,57.62 U3.7
NetU1_25: U1.25 U3.2 | length 22.6
  Top Layer w0.254: U1.25 80.25,71.25 v1(81,70.5) ; v1(82.5,55.25) 84.71,55.25 U3.2
  Bottom Layer w0.254: v1(81,70.5) 81.204,70.296 81.204,56.546 v1(82.5,55.25)
pads on no net: S.1 U1.1 U1.2 U1.3 U1.4 U1.10 U1.20 U1.21 U1.34 U1.45 U1.50 U1.53 U1.54 U_5V.8 U_5V.10

## Polygon pours and split planes (outlines as drawn)
no net on Top Layer (solid, pour order 8): 80.5,98
GND on Top Layer (solid, remove dead copper, pour order 6): 50,110 50,50 120,50 120,110
GND on Bottom Layer (solid, remove dead copper, pour order 10): 50,110 120,110 120,50 50,50

## Keep-outs
Keep-Out Layer:
  the board outline again, w1

## Other copper
Top Layer:
  text "Babics / Matyi" at 53.496,71.504 h1.52 r270
Bottom Layer:
  text "Babics / Matyi" at 53.496,62.496 h1.52 r270

## Text inside footprints (layer, text, board x,y; h text height)
U3: Bottom Overlay "8" at 94.144,55.468 h1.27 r180; Bottom Overlay "7" at 94.144,58.008 h1.27 r180; Bottom Overlay "1" at 82.968,58.008 h1.27 r180; Bottom Overlay "2" at 82.46,55.468 h1.27 r180